# EAGLE board PCB v54 (EAGLE 9.7.0)
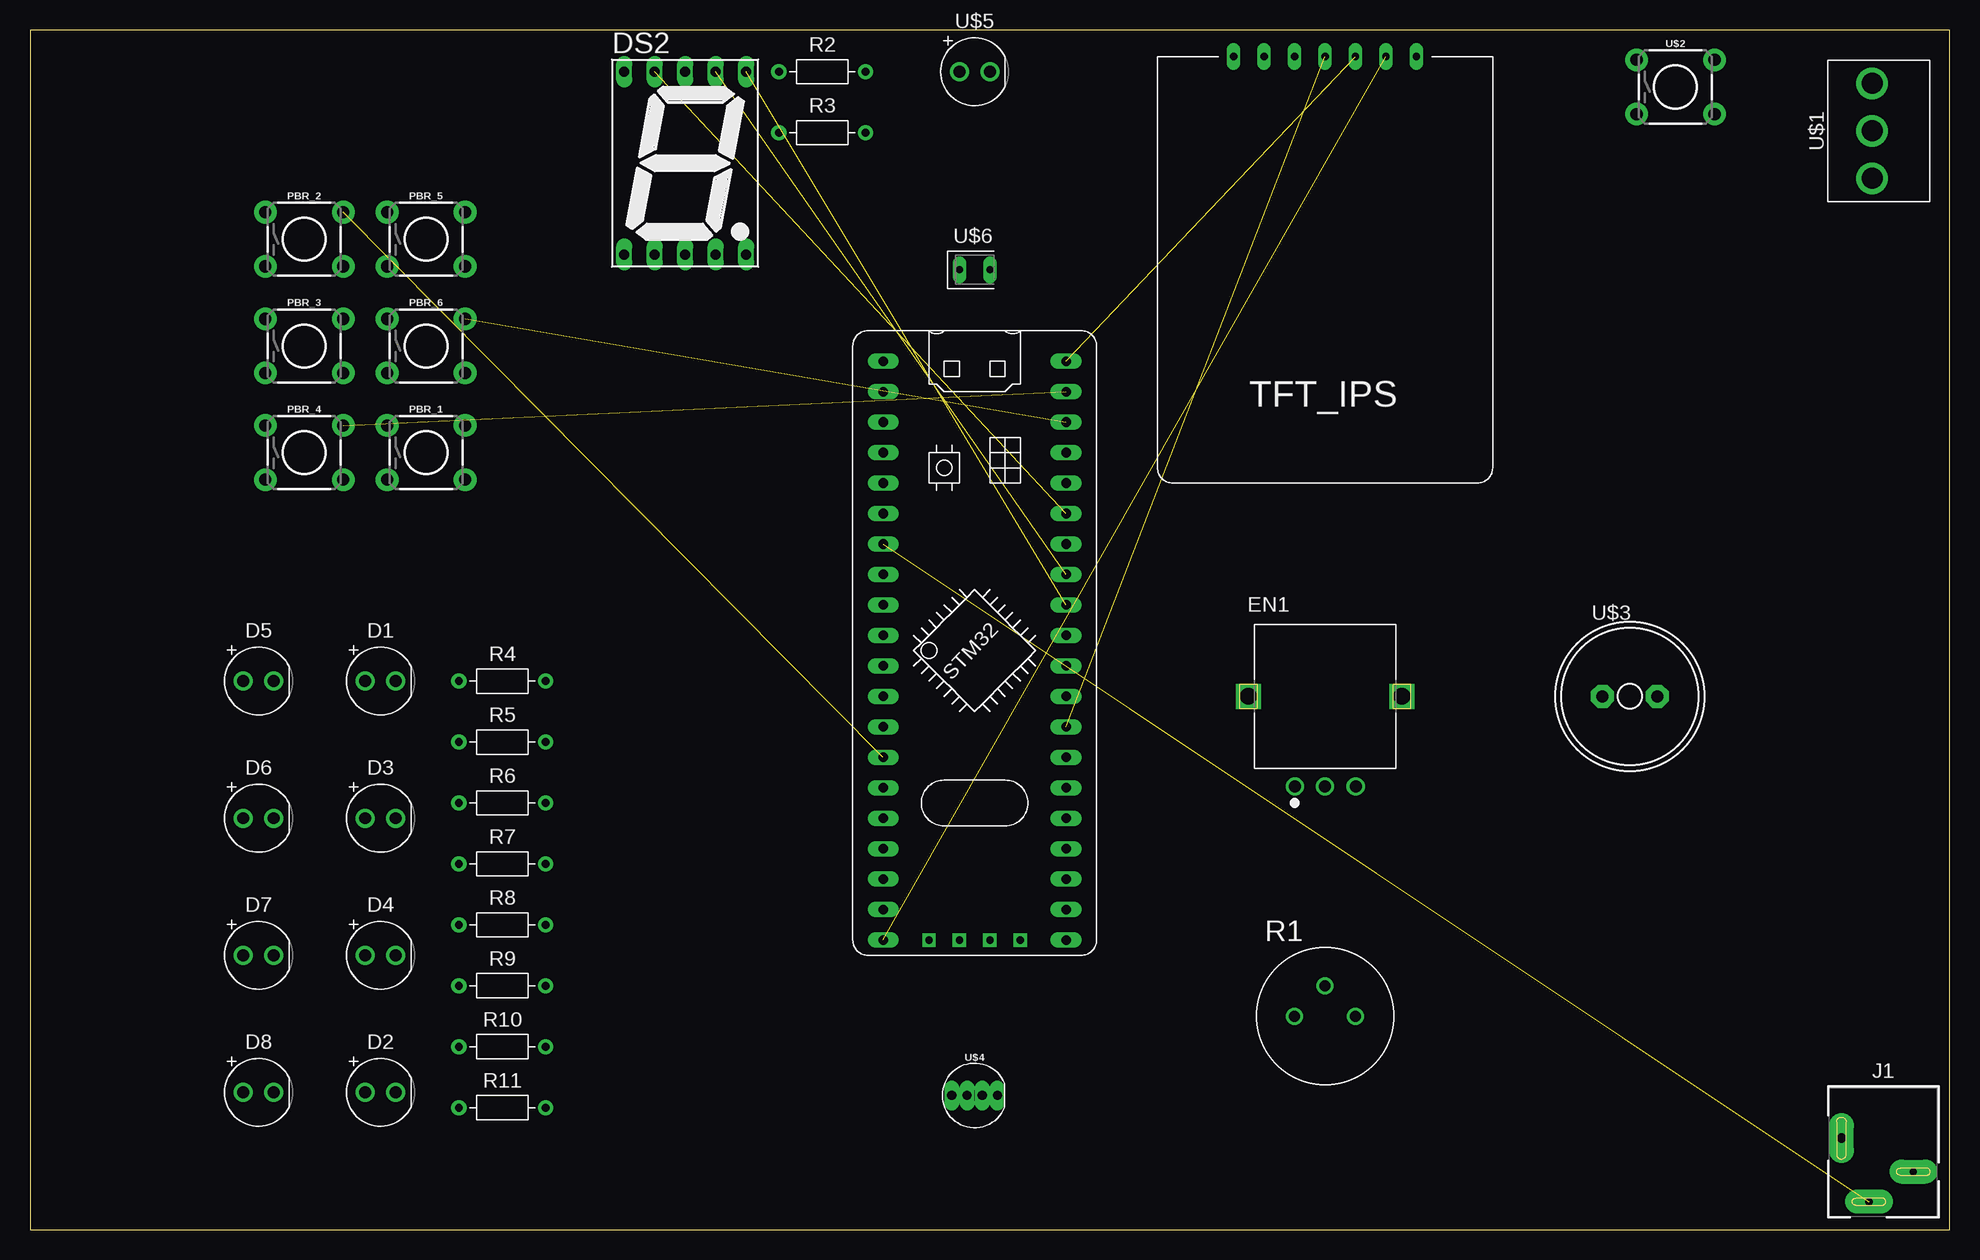
[diagram p0: board, top side]
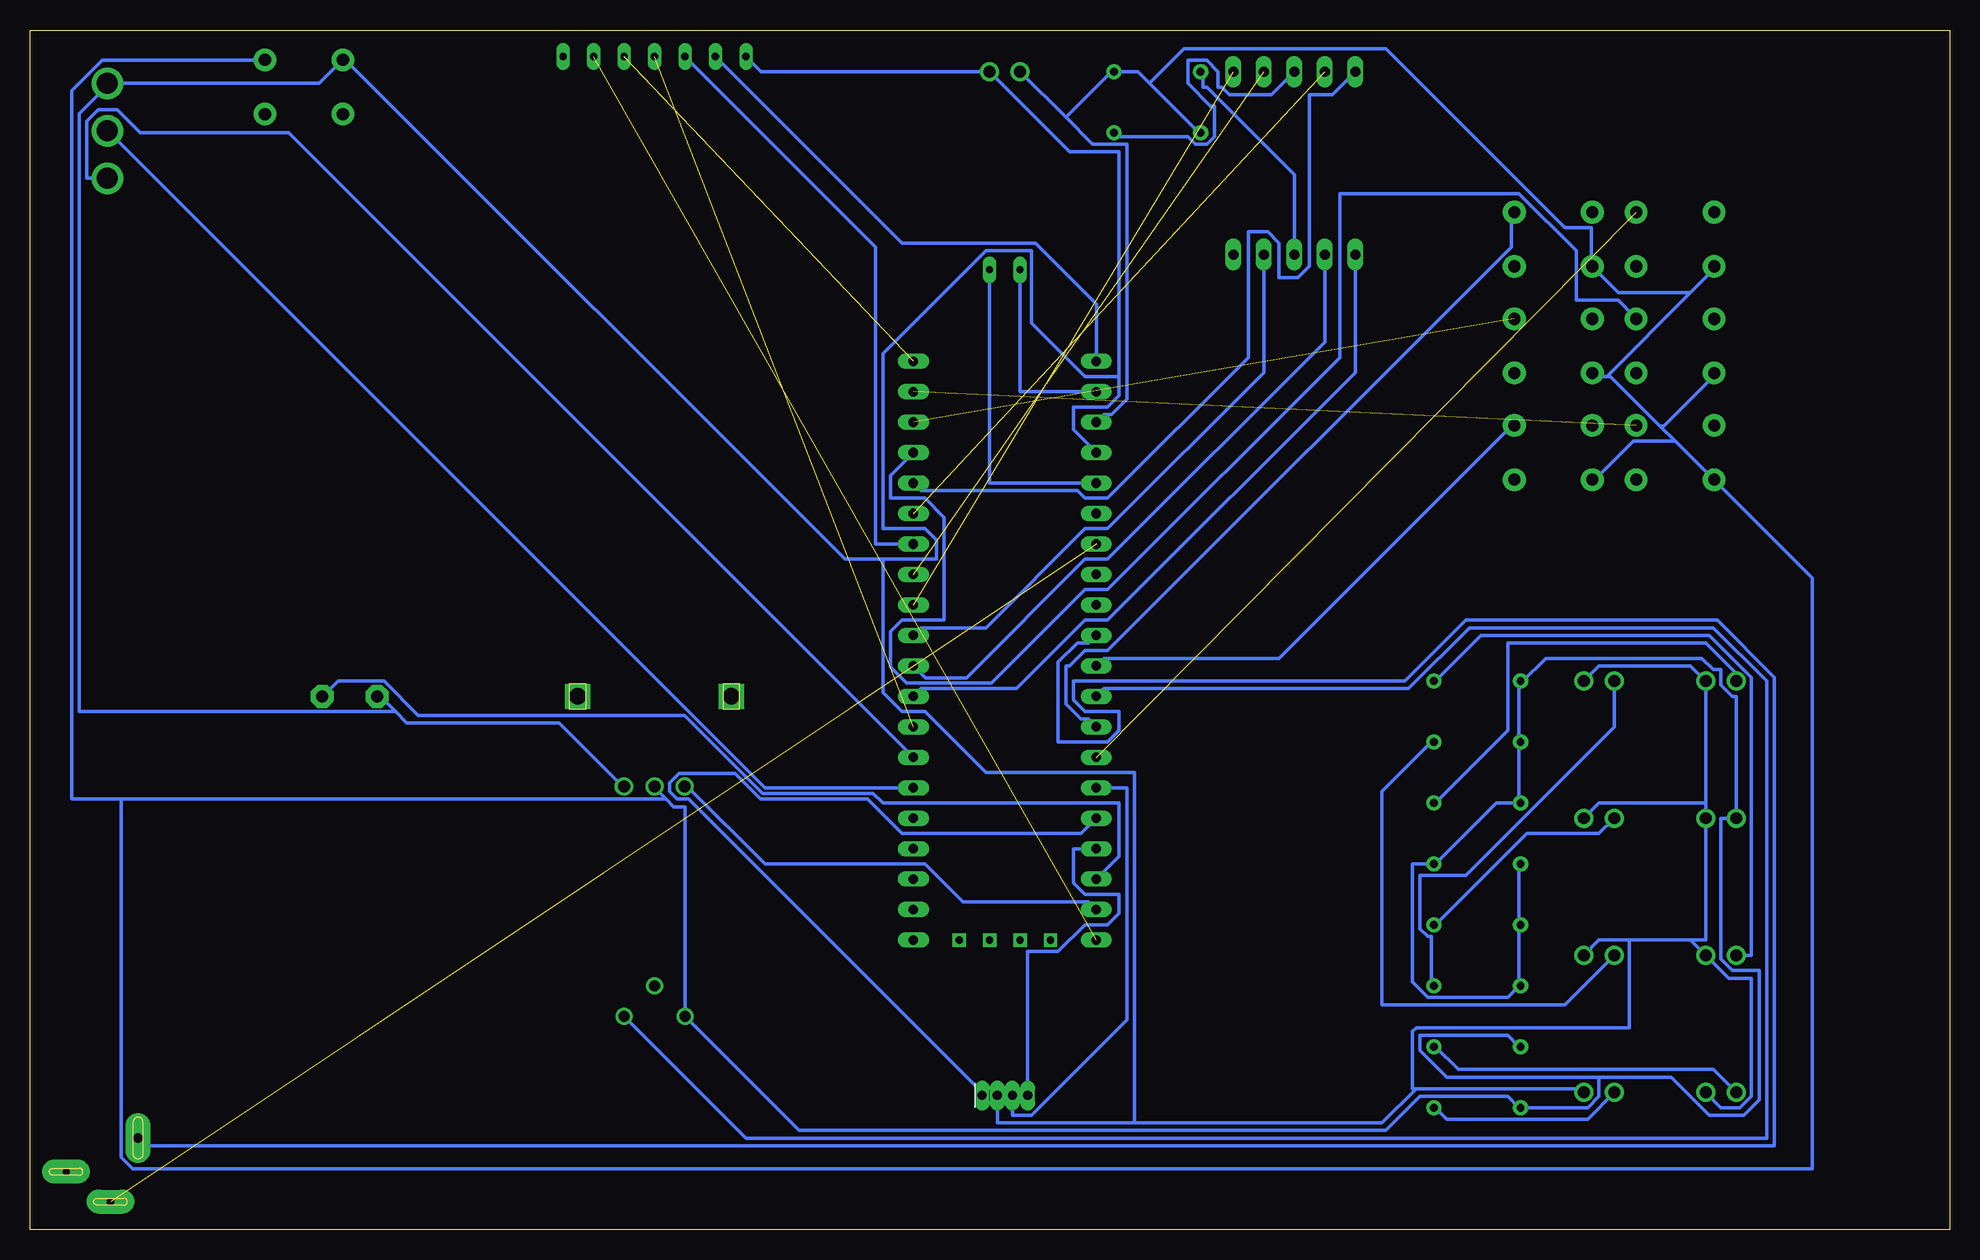
[diagram p1: board, bottom side, seen from below]

Size 160 x 100 mm. Coordinates in mm from the lower left corner, seen from the top.
Outline: 0,0 160,0 160,100 0,100 0,0
Copper layers (1*16): Top / Bottom
Stack-up Default Layer Stack: Top User Defined 0.035mm / Dielectric-1 User Defined 1.5mm / Bottom User Defined 0.035mm
Design rules "default *": minimum track width 12mil, minimum drill 0.35mm, track to track 6mil, track to pad 6mil, pad to pad 6mil, via to via 6mil, smd to smd 6mil, copper to edge 40mil, drill to drill 6mil, minimum pad ring 10mil, minimum via ring 8mil, stop-mask expansion 4mil, vias tented up to drill 0mil, thermal gap 10mil

## Footprints (pad centres in the part's own frame; a part is rotated, then mirrored left to right if it is on the bottom)
LEDRD254W60D565H860B = drill 0.981 pad 1.581: 1 -1.27,0; 2 1.27,0
7SEG-13 = drill 0.813 long: 1 -5.08,-7.62; 2 -2.54,-7.62; 3 0,-7.62; 4 2.54,-7.62; 5 5.08,-7.62; 6 5.08,7.62; 7 2.54,7.62; 8 0,7.62; 9 -2.54,7.62; 10 -5.08,7.62
TFT8 = drill 0.6 long: BLK 7.62,20.32; DC 5.08,20.32; GND -7.62,20.32; RES 2.54,20.32; SCL -2.54,20.32; SDA 0,20.32; VCC -5.08,20.32
PEC11L-4125K-N0020 = drill 1: A -2.5,-7.5; B 2.55,-7.5; C 0,-7.5 | drill 1.4 square: M1 -6.4,0; M2 6.4,0
694106402002 = drill 0.8 pad 2.1 long: 1 -3.5,0 | drill 0.6 pad 2 long: 2 -1.2,-5.3; 3 2.5,-2.8
TACTILE_SWITCH_PTH_6.0MM = drill 1.016 pad 1.88: 1 -3.251,2.261; 2 3.251,2.261; 3 -3.251,-2.261; 4 3.251,-2.261
3345P-1-502 = drill 0.91: 1 -2.54,0; 2 0,2.54; 3 2.54,0
RESAD724W46L381D178B = drill 0.66 pad 1.26: 1 -3.62,0; 2 3.62,0
B3P-VH_396_3N = drill 1.75: 1 0,0; 2 3.96,0; 3 7.92,0
EN_BUTTON = drill 1.016 pad 1.88: 1 -3.251,2.261; 2 3.251,2.261; 3 -3.251,-2.261; 4 3.251,-2.261
BUZZER = drill 1.016 pad 1.905 octagon: + 2.286,0; - -2.286,0
LED-RGB-THRU = drill 0.762 pad 0.889 long: 1 1.905,0; 2 0.635,0; 3 -0.635,0; 4 -1.905,0
LDR = drill 0.981 pad 1.581: 1 -1.27,0; 2 1.27,0
LED_POWER_ON = drill 0.6 long: P$1 -1.27,0; P$2 1.27,0
BLUE_PILL_3D = drill 0.8 long: P$1 -7.62,15.24; P$2 -7.62,12.7; P$3 -7.62,10.16; P$4 -7.62,7.62; P$5 -7.62,5.08; P$6 -7.62,2.54; P$7 -7.62,0; P$8 -7.62,-2.54; P$9 -7.62,-5.08; P$10 -7.62,-7.62; P$11 -7.62,-10.16; P$12 -7.62,-12.7; P$13 -7.62,-15.24; P$14 -7.62,-17.78; P$15 -7.62,-20.32; P$16 -7.62,-22.86; P$17 -7.62,-25.4; P$18 -7.62,-27.94; P$19 -7.62,-30.48; P$20 -7.62,-33.02; P$21 7.62,15.24; P$22 7.62,12.7; P$23 7.62,10.16; P$24 7.62,7.62; P$25 7.62,5.08; P$26 7.62,2.54; P$27 7.62,0; P$28 7.62,-2.54; P$29 7.62,-5.08; P$30 7.62,-7.62; P$31 7.62,-10.16; P$32 7.62,-12.7; P$33 7.62,-15.24; P$34 7.62,-17.78; P$35 7.62,-20.32; P$36 7.62,-22.86; P$37 7.62,-25.4; P$38 7.62,-27.94; P$39 7.62,-30.48; P$40 7.62,-33.02 | drill 0.6 square: P$41 3.81,-33.02; P$42 1.27,-33.02; P$43 -1.27,-33.02; P$44 -3.81,-33.02

## Placement (x,y rotation side)
D1  LED_RED  [LEDRD254W60D565H860B]  29.21,45.72 0 top
D2  LED_RED  [LEDRD254W60D565H860B]  29.21,11.43 0 top
D3  LED_RED  [LEDRD254W60D565H860B]  29.21,34.29 0 top
D4  LED_RED  [LEDRD254W60D565H860B]  29.21,22.86 0 top
D5  LED_RED  [LEDRD254W60D565H860B]  19.05,45.72 0 top
D6  LED_RED  [LEDRD254W60D565H860B]  19.05,34.29 0 top
D7  LED_RED  [LEDRD254W60D565H860B]  19.05,22.86 0 top
D8  LED_RED  [LEDRD254W60D565H860B]  19.05,11.43 0 top
DS2  7SEG-CA  [7SEG-13]  54.61,88.9 0 top
DSPLY1  TFT_IPS_1.3  [TFT8]  107.95,77.47 0 top
EN1  PEC11L-4125K-N0020  [PEC11L-4125K-N0020]  107.95,44.45 0 top
J1  [694106402002]  154.48,7.62 0 top
PBR_1  PUSHBUTTON_RED  [TACTILE_SWITCH_PTH_6.0MM]  33.02,64.77 0 top
PBR_2  PUSHBUTTON_RED  [TACTILE_SWITCH_PTH_6.0MM]  22.86,82.55 0 top
PBR_3  PUSHBUTTON_RED  [TACTILE_SWITCH_PTH_6.0MM]  22.86,73.66 0 top
PBR_4  PUSHBUTTON_RED  [TACTILE_SWITCH_PTH_6.0MM]  22.86,64.77 0 top
PBR_5  PUSHBUTTON_RED  [TACTILE_SWITCH_PTH_6.0MM]  33.02,82.55 0 top
PBR_6  PUSHBUTTON_RED  [TACTILE_SWITCH_PTH_6.0MM]  33.02,73.66 0 top
R1  3345P-1-502  [3345P-1-502]  107.95,17.78 0 top
R2  [RESAD724W46L381D178B]  66.04,96.52 0 top
R3  [RESAD724W46L381D178B]  66.04,91.44 0 top
R4  [RESAD724W46L381D178B]  39.37,45.72 0 top
R5  [RESAD724W46L381D178B]  39.37,40.64 0 top
R6  [RESAD724W46L381D178B]  39.37,35.56 0 top
R7  [RESAD724W46L381D178B]  39.37,30.48 0 top
R8  [RESAD724W46L381D178B]  39.37,25.4 0 top
R9  [RESAD724W46L381D178B]  39.37,20.32 0 top
R10  [RESAD724W46L381D178B]  39.37,15.24 0 top
R11  [RESAD724W46L381D178B]  39.37,10.16 0 top
U$1  B3P-VH  [B3P-VH_396_3N]  153.56,87.63 90 top
U$2  EN_BUTTON  [EN_BUTTON]  137.16,95.25 0 top
U$3  BUZZER  [BUZZER]  133.35,44.45 0 top
U$4  LED_RGB  [LED-RGB-THRU]  78.74,11.18 0 top
U$5  LDR  [LDR]  78.74,96.52 0 top
U$6  LED_POWER_ON  [LED_POWER_ON]  78.74,80.01 0 top
U$8  BLUE_PILL_3D  [BLUE_PILL_3D]  78.74,57.15 0 top

## Library data of the parts
D1-D8 = Opto-Electronic; CATEGORY: Opto-Electronic; SUB-CATEGORY: LED
DS2 = Opto-Electronic; CATEGORY: Opto-Electronic; SUB-CATEGORY: Display; TYPE: 7-Segment
DSPLY1 PBR_1-PBR_6 U$2-U$6 U$8 = 1.3_TFT_IPS
EN1 = Encoders; CREATED_BY: PCBLayout.com; DIGIKEY_PARTNO: PEC11L-4125K-N0020-ND; MANUFACTURER: Bourns Inc.; MPN: PEC11L-4125K-N0020
J1 = Connector; CATEGORY: Connector; DESCRIPTION: DC POWER JACK - VERTICAL - THT - 2.0 & 2.5Ø - WR-DC; MANUFACTURER: Würth Elektronik; MPN: 694106402002; OPERATING_TEMPERATURE: -40°C to +85°C; PART_STATUS: Active; ROHS_COMPLIANCE: RoHS Compliant; SERIES: WR-DC; SUBCATEGORY: Power Connector; TYPE: Vertical
R1 = Potentiometer_Trimmers; CREATED_BY: PCBLayout.com; DIGIKEY_PN: 3345P-502-ND; MANUFACTURER: Bourns Inc.; MPN: 3345P-1-502
R2-R11 = Resistor; CATEGORY: Resistor; SUB-CATEGORY: Fixed
U$1 = Connector; CATEGORY: Connector; DESCRIPTION: CONN HEADER VERT 3POS 3.96MM; MANUFACTURER: JST Sales America Inc.; MPN: B3P-VH; OPERATING_TEMPERATURE: -25°C ~ 85°C; PART_STATUS: Active; ROHS_COMPLIANCE: RoHS2 Compliant; SERIES: VH; TYPE: Top Entry

## Nets
3.3V: DSPLY1.VCC U$8.P$1
3.3V1: U$6.P$1 U$8.P$2
5V: D6.1 EN1.C PBR_1.3 PBR_2.3 PBR_3.3 PBR_4.3 PBR_5.3 PBR_6.3 R1.1 R2.2 R3.1 R4.1 R5.1 R6.1 R7.1 R7.2 R8.1 R9.1 R10.1 R11.1 U$2.2 U$5.1 U$8.P$3
AGND: J1.3
GND: D1.2 D2.2 D3.2 D4.2 D5.2 D6.2 D7.2 D8.2 DSPLY1.GND EN1.B U$1.3 U$2.1 U$3.- U$4.2 U$5.2 U$8.P$4
GND1: U$6.P$2 U$8.P$5
N$3: DS2.3 R2.1
N$4: DS2.8 R3.2
N$11: D4.1 R5.2
N$12: D5.1 R6.2
N$13: D7.1 R4.2
N$14: D3.1 R8.2
N$15: D8.1 R10.2
N$16: D2.1 R11.2
N$17: D1.1 R9.2
N$18: J1.1 U$8.P$10
N$19: J1.2 U$8.P$7
PA0: PBR_1.2 U$8.P$11
PA1: R1.3 U$8.P$12
PA2: PBR_5.2 U$8.P$13
PA3: PBR_2.2 U$8.P$14
PA4: U$4.3 U$8.P$15
PA5: U$4.1 U$8.P$16
PA6: U$4.4 U$8.P$17
PA7: U$3.+ U$8.P$18
PA8: EN1.A U$8.P$19
PA9: DSPLY1.DC U$8.P$20
PA10: DSPLY1.RES U$8.P$21
PA11: PBR_4.2 U$8.P$22
PA12: PBR_6.2 U$8.P$23
PA15: PBR_3.2 U$8.P$24
PB0: DS2.10 U$8.P$25
PB1: DS2.9 U$8.P$26
PB3: DSPLY1.SCL U$8.P$27
PB4: DS2.7 U$8.P$28
PB5: DS2.6 U$8.P$29
PB6: DS2.4 U$8.P$30
PB7: DS2.2 U$8.P$31
PB8: DS2.1 U$8.P$32
PB9: DSPLY1.SDA U$8.P$33
PB10: U$1.1 U$8.P$34
PB11: U$1.2 U$8.P$35

## Tracks (layer width: path | path; a pad name or v marks a point on that pad's centre or on a via)
3.3V
  Bottom 0.305: DSPLY1.VCC 87.31,82.23 76.2,82.23 71.12,77.15 U$8.P$1
3.3V1
  Bottom 0.305: U$6.P$1 77.47,69.85 U$8.P$2
5V
  Bottom 0.305: 24.13,66.99 28.26,71.12 28.57,71.12 | 24.13,66.99 22.86,65.72 | 22.86,65.72 19.68,62.55 PBR_4.3 19.37,62.23 11.43,54.29 11.43,5.08 151.45,5.08 152.4,6.03 152.4,35.88 | 28.57,71.12 29.53,71.12 PBR_6.3 | 22.86,65.72 26.35,65.72 29.53,62.55 PBR_1.3 | 24.13,66.99 23.81,66.99 19.68,71.12 PBR_3.3 | 28.57,71.12 21.59,78.11 | 21.59,78.11 19.68,80.01 PBR_2.3 | 21.59,78.11 27.62,78.11 29.53,80.01 PBR_5.3 29.84,80.33 29.84,83.5 32.07,83.5 46.99,98.42 63.82,98.42 66.67,95.57 | 66.67,95.57 67.63,96.52 R2.2 69.85,96.52 73.66,92.71 | 66.67,95.57 62.55,91.44 R3.1 | U$8.P$3 70.48,67.94 69.85,67.94 68.58,69.22 68.58,90.49 71.44,90.49 73.66,92.71 | U$5.1 73.66,92.71 | 29.21,12.7 29.21,11.11 30.16,10.16 R11.1 35.88,10.16 36.83,11.11 44.13,11.11 46.99,8.26 95.89,8.26 R1.1 105.41,35.24 106.36,35.24 107,35.88 | 29.21,12.7 41.91,12.7 44.13,14.92 44.13,16.19 36.83,16.19 35.88,15.24 R10.1 | 35.88,25.4 35.88,20.32 | 35.88,25.4 35.88,30.48 R7.1 | 35.88,25.4 R8.1 | 35.88,40.64 35.88,35.56 | 35.88,40.64 35.88,45.72 R4.1 35.56,45.72 33.66,47.62 20.64,47.62 19.68,46.67 19.05,46.67 19.05,45.4 18.1,44.45 17.78,44.45 D6.1 19.05,34.29 19.05,22.54 18.1,21.59 15.88,21.59 15.88,10.79 17.14,9.53 20,9.53 23.18,12.7 29.21,12.7 | 35.88,40.64 R5.1 | 35.88,35.56 37.78,35.56 42.86,30.48 R7.2 44.77,30.48 44.77,20.64 43.5,19.37 36.83,19.37 35.88,20.32 | 35.88,35.56 R6.1 | 35.88,20.32 R9.1 | 107,35.88 107.95,36.83 EN1.C | 107,35.88 152.4,35.88 | 152.4,35.88 156.53,35.88 156.53,94.93 153.99,97.47 140.65,97.47 U$2.2
GND
  Bottom 0.305: 20.32,35.56 D5.2 21.59,46.99 29.21,46.99 D1.2 | 20.32,35.56 D6.2 20.32,24.13 21.59,24.13 | D3.2 29.21,35.56 20.32,35.56 | D8.2 19.05,10.16 17.46,10.16 16.51,11.11 16.51,20.95 18.41,20.95 D7.2 21.59,24.13 | D4.2 29.21,24.13 26.67,24.13 | 21.59,24.13 26.67,24.13 | U$4.2 79.38,8.89 67.94,8.89 | 67.94,8.89 47.31,8.89 44.45,11.75 | 44.45,11.75 30.8,11.75 D2.2 | 26.67,24.13 26.67,16.83 44.45,16.83 44.77,16.51 44.77,11.75 44.45,11.75 | DSPLY1.GND 99.06,96.52 U$5.2 73.34,89.85 69.22,89.85 69.22,71.12 | U$8.P$4 73.03,66.67 73.03,68.58 70.17,68.58 69.22,69.53 69.22,71.12 | 129.54,43.18 130.81,44.45 U$3.- | 129.54,43.18 128.59,42.23 115.89,42.23 110.81,37.15 EN1.B | 129.54,43.18 155.89,43.18 155.89,93.03 153.67,95.25 U$1.3 153.35,95.57 135.89,95.57 133.99,97.47 U$2.1 133.67,97.47 92.08,55.88 88.9,55.88 | 69.22,71.12 72.07,71.12 76.52,75.56 76.52,81.6 80.33,81.6 88.9,73.03 88.9,58.42 85.41,58.42 84.45,57.47 84.45,55.88 88.9,55.88 | 67.94,8.89 67.94,38.1 80.33,38.1 85.41,43.18 87.31,43.18 88.9,44.77 88.9,55.88
GND1
  Bottom 0.305: U$6.P$2 80.01,62.23 U$8.P$5
N$3
  Bottom 0.305: DS2.3 54.61,87.95 61.91,95.25 62.23,95.25 62.23,96.52 R2.1
N$4
  Bottom 0.305: DS2.8 56.52,94.61 60.01,94.61 60.64,95.25 60.96,95.25 60.96,96.52 61.91,97.47 63.5,97.47 63.5,95.57 61.59,93.66 61.28,93.66 61.28,91.12 61.91,90.49 62.87,90.49 63.5,91.12 69.22,91.12 69.53,91.44 R3.2
N$11
  Bottom 0.305: D4.1 32.07,18.73 47.31,18.73 47.31,36.51 43.18,40.64 R5.2
N$12
  Bottom 0.305: D5.1 17.78,46.35 20.32,48.9 36.83,48.9 36.83,41.59 42.86,35.56 R6.2
N$13
  Bottom 0.305: D7.1 16.51,22.86 16.51,46.04 20,49.53 39.05,49.53 42.86,45.72 R4.2
N$14
  Bottom 0.305: D3.1 29.21,33.02 35.24,33.02 42.86,25.4 R8.2
N$15
  Bottom 0.305: D8.1 19.68,13.34 40.96,13.34 42.86,15.24 R10.2
N$16
  Bottom 0.305: D2.1 30.16,9.21 41.91,9.21 42.86,10.16 R11.2
N$17
  Bottom 0.305: D1.1 27.94,41.91 40.32,29.53 44.13,29.53 44.13,25.08 43.5,24.45 43.18,24.45 43.18,20.32 R9.2
N$18
  Bottom 0.305: U$8.P$10 71.75,48.9 72.71,48.9 74.3,47.31 74.3,40.64 70.17,40.64 69.22,41.59 69.22,43.18 72.07,43.18 73.03,44.13 73.03,45.72 45.4,45.72 40.32,50.8 19.37,50.8 14.61,46.04 14.61,6.99 150.18,6.99 150.81,7.62 J1.1
N$19  (1 unrouted)
PA0
  Bottom 0.305: U$8.P$11 70.48,47.62 55.88,47.62 36.51,66.99 PBR_1.2
PA1
  Bottom 0.305: U$8.P$12 70.48,45.09 45.09,45.09 40.01,50.16 19.68,50.16 15.24,45.72 15.24,7.62 100.33,7.62 R1.3
PA2
  Bottom 0.305: U$8.P$13 71.75,42.55 72.39,42.55 73.66,43.81 73.66,46.99 73.34,46.99 72.07,48.26 70.17,48.26 36.51,81.92 36.51,84.77 PBR_5.2
PA3  (1 unrouted)
PA4
  Bottom 0.305: U$4.3 78.11,9.53 76.52,9.53 68.58,17.46 68.58,36.83 U$8.P$15
PA5
  Bottom 0.305: U$8.P$16 72.39,33.02 87.31,33.02 90.21,35.92 99.12,35.92 101.21,38.01 105.89,38.01 106.68,37.22 106.68,36.51 106.05,35.88 105.09,35.88 80.64,11.43 U$4.1
PA6
  Bottom 0.305: U$4.4 76.83,23.18 74.3,23.18 72.07,25.4 70.17,25.4 69.22,26.35 69.22,27.94 72.07,27.94 73.03,28.89 73.03,31.75 U$8.P$17
PA7
  Bottom 0.305: U$8.P$18 69.22,31.11 69.22,35.56 88.9,35.56 89.71,36.37 98.93,36.37 105.42,42.86 127.64,42.86 130.49,45.72 134.3,45.72 135.57,44.45 U$3.+
PA8
  Bottom 0.305: U$8.P$19 71.75,27.3 82.23,27.3 85.41,30.48 98.74,30.48 105.09,36.83 105.41,36.83 EN1.A
PA9  (1 unrouted)
PA10  (1 unrouted)
PA11  (1 unrouted)
PA12  (1 unrouted)
PA15
  Bottom 0.305: U$8.P$24 88.27,62.87 88.27,60.96 85.41,60.96 83.82,59.37 83.82,50.8 87.31,50.8 88.27,49.85 88.27,46.88 86.92,45.54 79.87,45.54 72.07,53.34 70.17,53.34 50.8,72.71 50.8,86.36 35.88,86.36 31.11,81.6 31.11,77.47 27.62,77.47 26.35,76.2 PBR_3.2
PB0
  Bottom 0.305: U$8.P$25 85.72,61.59 72.71,61.59 72.07,60.96 70.17,60.96 58.42,72.71 58.42,83.19 56.83,83.19 55.88,82.23 55.88,79.38 54.29,79.38 53.34,80.33 53.34,94.61 51.44,94.61 DS2.10
PB1  (1 unrouted)
PB3
  Bottom 0.305: DSPLY1.SCL 89.53,81.92 89.53,57.15 U$8.P$27
PB4  (1 unrouted)
PB5  (1 unrouted)
PB6
  Bottom 0.305: U$8.P$30 85.72,50.16 80.33,50.16 72.07,58.42 70.17,58.42 57.15,71.44 DS2.4
PB7
  Bottom 0.305: DS2.2 52.07,73.98 70.17,55.88 72.07,55.88 81.95,46 85.37,46 U$8.P$31
PB8
  Bottom 0.305: U$8.P$32 85.72,45.09 77.79,45.09 72.07,50.8 70.17,50.8 49.53,71.44 DS2.1
PB9  (1 unrouted)
PB10
  Bottom 0.305: U$8.P$34 138.43,91.44 150.81,91.44 152.72,93.34 154.31,93.34 155.26,92.39 155.26,87.63 U$1.1
PB11
  Bottom 0.305: U$8.P$35 98.74,36.83 153.35,91.44 U$1.2